# Altium PCB servo_board.PcbDoc
Units mm, origin at the board's own origin, x right, y up, seen from the top; angles counter-clockwise.
Board outline 113 x 24 mm, 2 copper layers (Top Layer, Bottom Layer); 18 components, 12 nets, 59 pads, 0 vias.
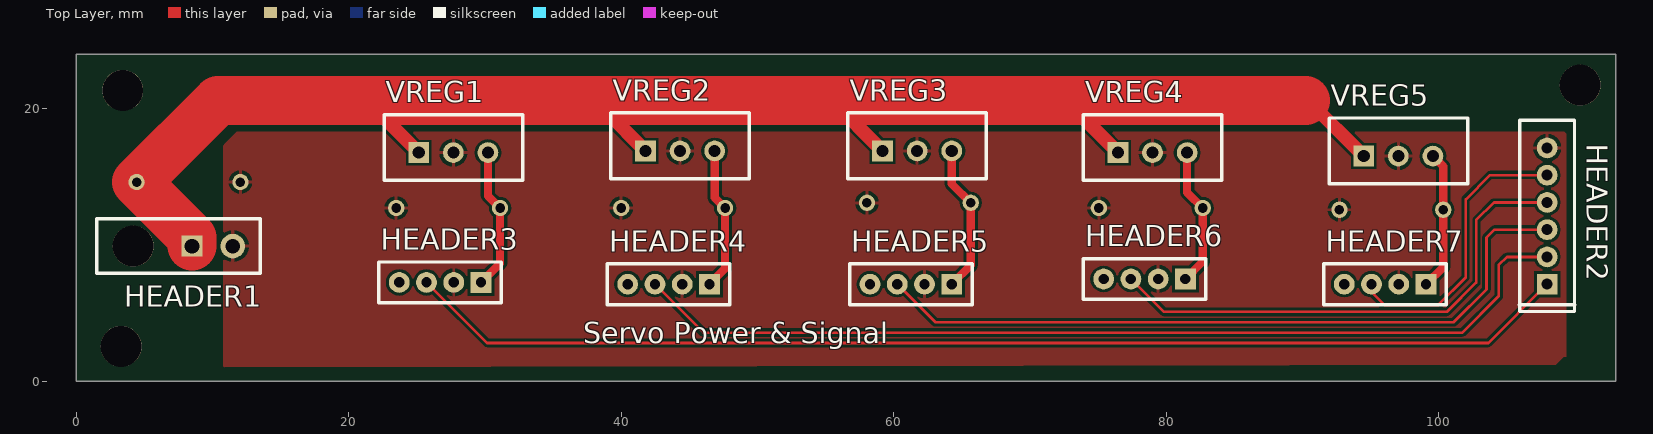
[diagram p0: Top Layer view]
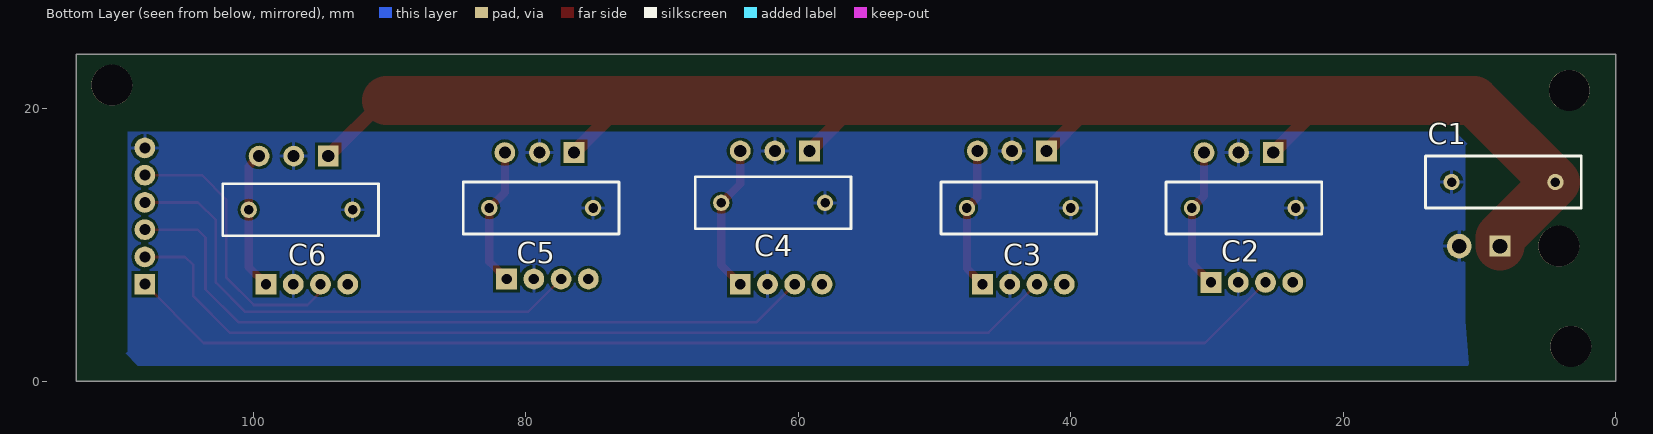
[diagram p1: Bottom Layer view, seen from below]

## Layer stack, top to bottom
Top Layer: signal copper 0.0356
Dielectric: dielectric 0.32, FR-4, Dk 4.8
Bottom Layer: signal copper 0.0356

## Board outline
0,0 0,24 113,24 113,0

## Design rules (kind name [scope] priority, off if disabled: settings)
Clearance [All] p1: gap=0.2
PolygonConnect [All] p1: connectstyle=Relief reliefconductorwidth=0.254 reliefentries=4 polygonreliefangle="90 Angle" airgapwidth=0.254
RoutingVias [All] p1: holewidth=0.711 width=1.27 viastyle="Through Hole" minholewidth=0.711 minwidth=1.27 maxholewidth=0.711 maxwidth=1.27
SolderMaskExpansion [All] p1: expansion=0.102
Width [All] p1: maxlimit=4 minlimit=0.2 preferedwidth=0.2
28 further rules are at their usual default settings.

## Classes and differential pairs
component class U_servo_power: C1 C2 C3 C4 C5 C6 HEADER1 VREG1 VREG2 VREG3 VREG4 VREG5
component class U_servo_headers: HEADER2 HEADER3 HEADER4 HEADER5 HEADER6 HEADER7

## Components (designator, comment, footprint, x,y, rotation, side; value= is the part's Value field where it differs from the comment)
C1 "Cap" RAD-0.3 8.255,14.605 r180 bottom
C2 "Cap" RAD-0.3 27.305,12.7 r0 bottom
C3 "Cap" RAD-0.3 43.815,12.7 r0 bottom
C4 "Cap" RAD-0.3 61.849,13.081 r0 bottom
C5 "Cap" RAD-0.3 78.867,12.7 r0 bottom
C6 "Cap" RAD-0.3 96.52,12.573 r0 bottom
HEADER1 "MICROFIT2WAY" MICROFIT2WAY 8.509,9.906 r270 top
HEADER2 "PH HEADER 6 WAY" "PH CONNECTOR 6 WAY" 107.95,7.112 r90 top
HEADER3 "PH HEADER 4 WAY" "PH_HEADER 4WAY" 29.718,7.239 r180 top
HEADER4 "PH HEADER 4 WAY" "PH_HEADER 4WAY" 46.482,7.112 r180 top
HEADER5 "PH HEADER 4 WAY" "PH_HEADER 4WAY" 64.262,7.112 r180 top
HEADER6 "PH HEADER 4 WAY" "PH_HEADER 4WAY" 81.407,7.493 r180 top
HEADER7 "PH HEADER 4 WAY" "PH_HEADER 4WAY" 99.06,7.112 r180 top
VREG1 "VREG" "TO-220 VREG" 22.606,19.558 r0 top
VREG2 "VREG" "TO-220 VREG" 39.243,19.685 r0 top
VREG3 "VREG" "TO-220 VREG" 56.642,19.685 r0 top
VREG4 "VREG" "TO-220 VREG" 73.914,19.558 r0 top
VREG5 "VREG" "TO-220 VREG" 91.948,19.304 r0 top

## Footprints (in the part's own frame and the unit in brackets; to place one, negate y for a bottom-side part, rotate by r counter-clockwise, add the part's x,y. Pads: shape width x height; smd on the part's side, far side on the other; paste and mask are expansions set on the pad)
MICROFIT2WAY [mm] "MICROFIT2WAY"
  round 3 hole 3: 0(0,-4.32)
  rect 1.524x1.524 hole 1.07: 1(0,0)
  round 1.8 hole 1.07: 2(0,3)
  silkscreen extent -2,-7 2,5
"PH CONNECTOR 6 WAY" [mil] "PH CONNECTOR 6 WAY"
  rect 60x60 hole 31.5: 1(0,0)
  round 60 hole 31.5: 2(78.74,0) 3(157.48,0) 4(236.22,0) 5(314.96,0) 6(393.7,0)
  silkscreen extent -79,-80 474,80
"PH_HEADER 4WAY" [mil] "4 WAY PH HEADER"
  rect 60x60 hole 30: 1(0,0)
  round 60 hole 30: 2(78.74,0) 3(157.48,0) 4(236.22,0)
  silkscreen extent -59,-59 295,59
RAD-0.3 [mm] "Radial Cap, Thru-Hole; 2 Leads; 0.3 in Pin Spacing"
  round 1.2 hole 0.7: 1(-3.81,0) 2(3.81,0)
  silkscreen extent -5.71,-1.91 5.71,1.91
"TO-220 VREG" [mil] "TO-220 PACKAGE VREG"
  rect 60x60 hole 35: 1(100,-110)
  round 60 hole 35: 2(200,-110) 3(300,-110)
  silkscreen extent 0,-190 400,0

## Part data
C1 C2 C3 C4 C5 C6: "Capacitor"
HEADER1: library part "MICROFIT2WAY HEADER", "MICROFIT2WAY HEADER"
VREG1 VREG2 VREG3 VREG4 VREG5: library part "VOLTAGE REGULATOR", "VOLTAGE REGULATOR"

## Free pads (board coordinates)
  round 3 hole 3: 0(3.302,2.54) 0(3.429,21.336) 0(110.363,21.717)

## Nets (pads, with @x,y where several pads share a name; then routed paths per layer and width w, separated by ;. In a path a pad name is that pad's centre, name@x,y a point inside that pad or via, vN(x,y) a via of type N, cw(c..) or ccw(c..) an arc to the next point about the centre after c; other vN are vias at no path point)
GND: C1.1 C2.1 C3.1 C4.1 C5.1 C6.1 HEADER1.2 HEADER2.6 HEADER3.2 HEADER4.2 HEADER5.2 HEADER6.2 HEADER7.2 VREG1.2 VREG2.2 VREG3.2 VREG4.2 VREG5.2
NetC1_2: C1.2 HEADER1.1 VREG1.1 VREG2.1 VREG3.1 VREG4.1 VREG5.1 | length 118.7
  Top Layer w1: 22.098,19.812 VREG1.1 ; 38.989,19.685 VREG2.1 ; 55.499,20.574 VREG3.1 ; 73.025,20.193 VREG4.1 ; 90.424,20.574 VREG5.1
  Top Layer w3.6: HEADER1.1 8.509,10.541 C1.2 10.414,20.574 55.499,20.574 90.202,20.574
NetC2_2: C2.2 HEADER3.1 VREG1.3 | length 10.5
  Top Layer w0.6: HEADER3.1 31.115,8.636 C2.2 30.226,13.589 VREG1.3
NetC3_2: C3.2 HEADER4.1 VREG2.3 | length 10.6
  Top Layer w0.6: HEADER4.1 47.625,8.255 C3.2 46.863,13.462 VREG2.3
NetC4_2: C4.2 HEADER5.1 VREG3.3 | length 10.9
  Top Layer w0.6: HEADER5.1 65.659,8.509 C4.2 64.262,14.478 VREG3.3
NetC5_2: C5.2 HEADER6.1 VREG4.3 | length 10.3
  Top Layer w0.6: HEADER6.1 82.677,8.763 C5.2 81.534,13.843 VREG4.3
NetC6_2: C6.2 HEADER7.1 VREG5.3 | length 10.2
  Top Layer w0.6: HEADER7.1 100.33,8.382 C6.2 100.33,15.748 VREG5.3
NetHEADER2_1: HEADER2.1 HEADER3.3 | length 85.9
  Top Layer w0.2: HEADER3.3 30.163,2.794 103.632,2.794 HEADER2.1
NetHEADER2_2: HEADER2.2 HEADER4.3 | length 70.6
  Top Layer w0.2: HEADER4.3 46.038,3.556 101.727,3.556 104.394,6.223 104.394,8.509 104.997,9.112 HEADER2.2
NetHEADER2_3: HEADER2.3 HEADER5.3 | length 53.9
  Top Layer w0.2: HEADER5.3 63.056,4.318 101.092,4.318 103.505,6.731 103.505,10.541 104.076,11.112 HEADER2.3
NetHEADER2_4: HEADER2.4 HEADER6.3 | length 37.5
  Top Layer w0.2: HEADER6.3 79.82,5.08 100.584,5.08 102.743,7.239 102.743,11.811 104.044,13.112 HEADER2.4
NetHEADER2_5: HEADER2.5 HEADER7.3 | length 21.1
  Top Layer w0.2: HEADER7.3 95.06,6.54 96.012,5.588 99.949,5.588 101.981,7.62 101.981,13.335 103.758,15.112 HEADER2.5
pads on no net: HEADER1.0 HEADER3.4 HEADER4.4 HEADER5.4 HEADER6.4 HEADER7.4

## Polygon pours and split planes (outlines as drawn)
GND on Bottom Layer "Bottom Layer-No Net" (solid, pour order 4): 11.049,4.445 11.049,17.272 10.922,17.399 11.811,18.288 109.22,18.288 109.22,2.159 109.347,2.032 108.458,1.143 10.795,1.143
GND on Top Layer "Bottom Layer-No Net" (solid, pour order 10): 10.795,1.016 10.795,17.272 10.922,17.399 11.811,18.288 11.938,18.288 109.22,18.288 109.347,18.161 109.347,1.778 109.18,1.778 108.593,1.191

## Silkscreen, mask and mechanical layers (free items; w line width, h text height)
Top Overlay:
  text "Servo Power & Signal" at 37.211,2.794 h1.52
Mechanical 1:
  the board outline again, w0.254